# Altium PCB Charger Module.pcbdoc
Units mil, origin at the board's own origin, x right, y up, seen from the top; angles counter-clockwise.
Board outline 5905.51 x 4527.56 mil, 2 copper layers (Top Layer, Bottom Layer); 43 components, 26 nets, 106 pads, 0 vias.
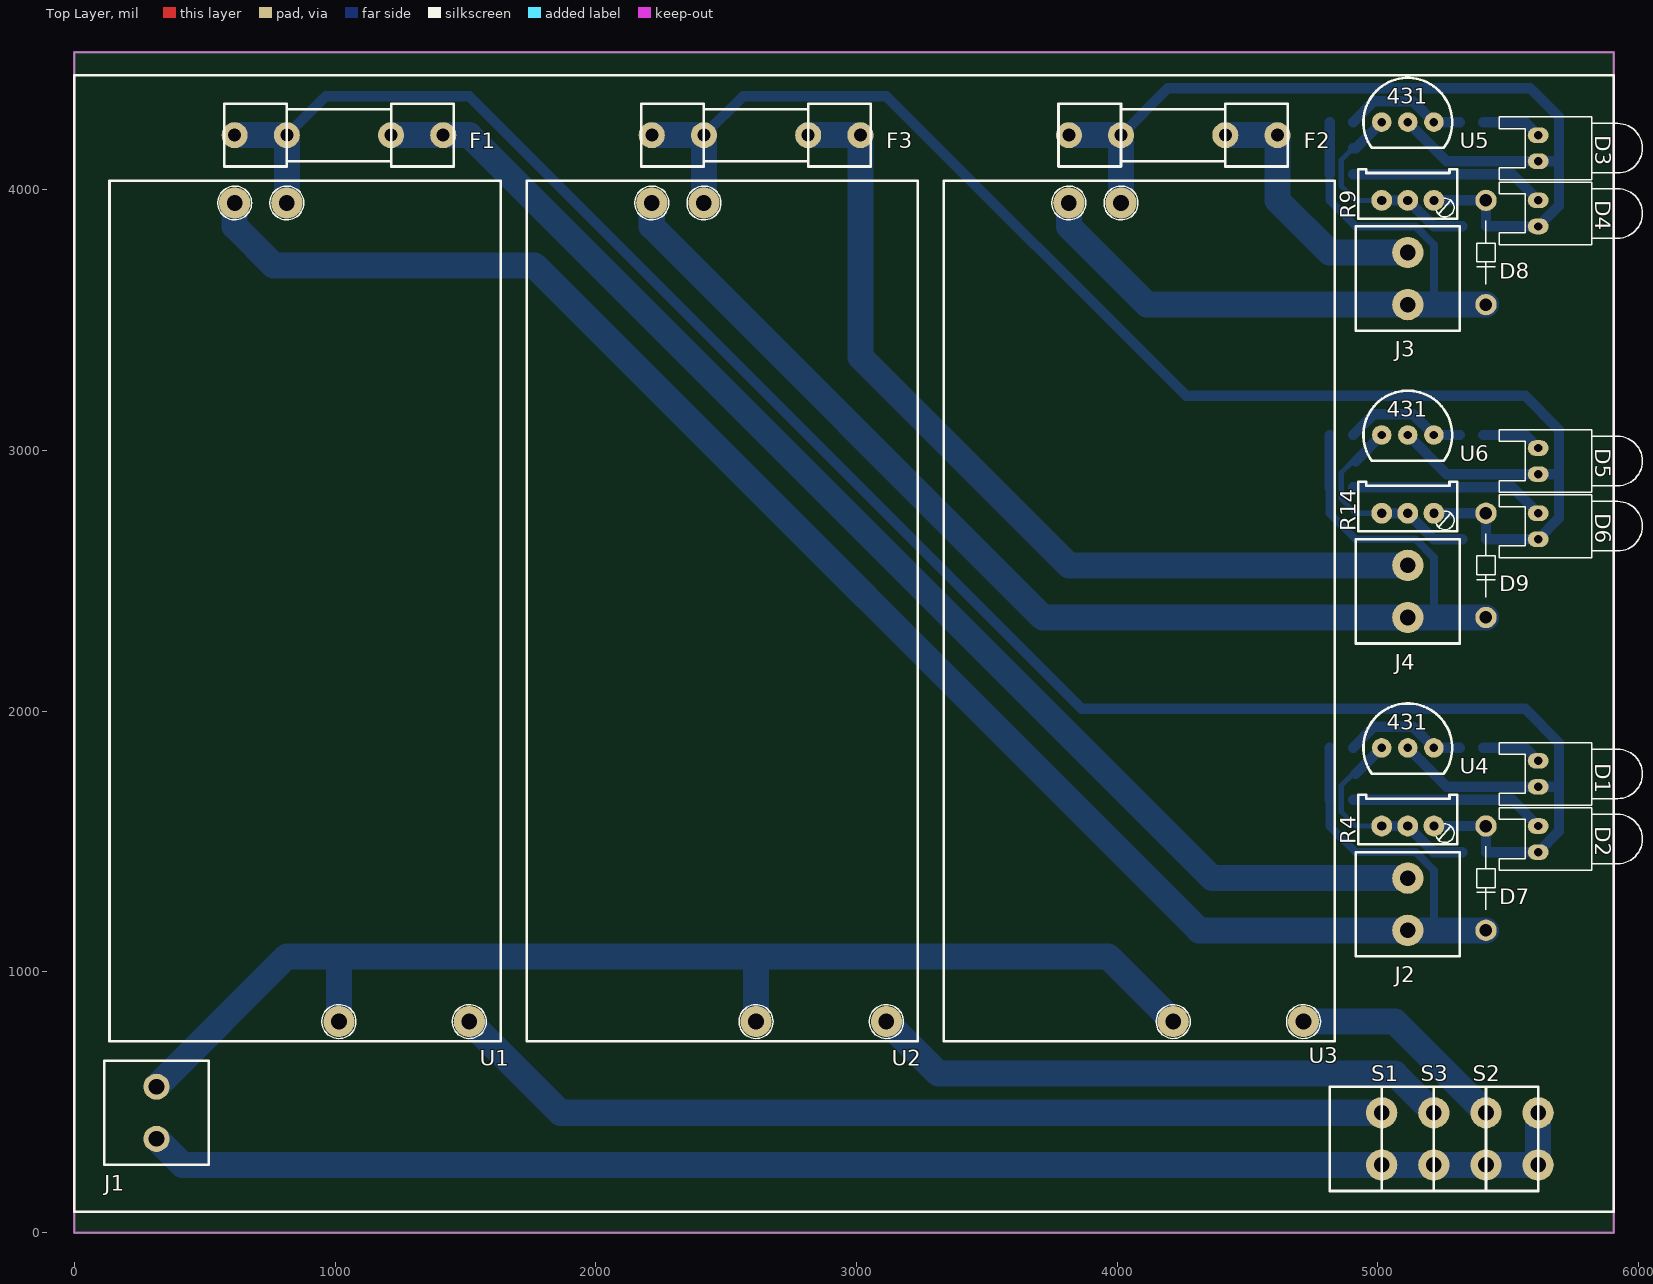
[diagram p0: Top Layer view]
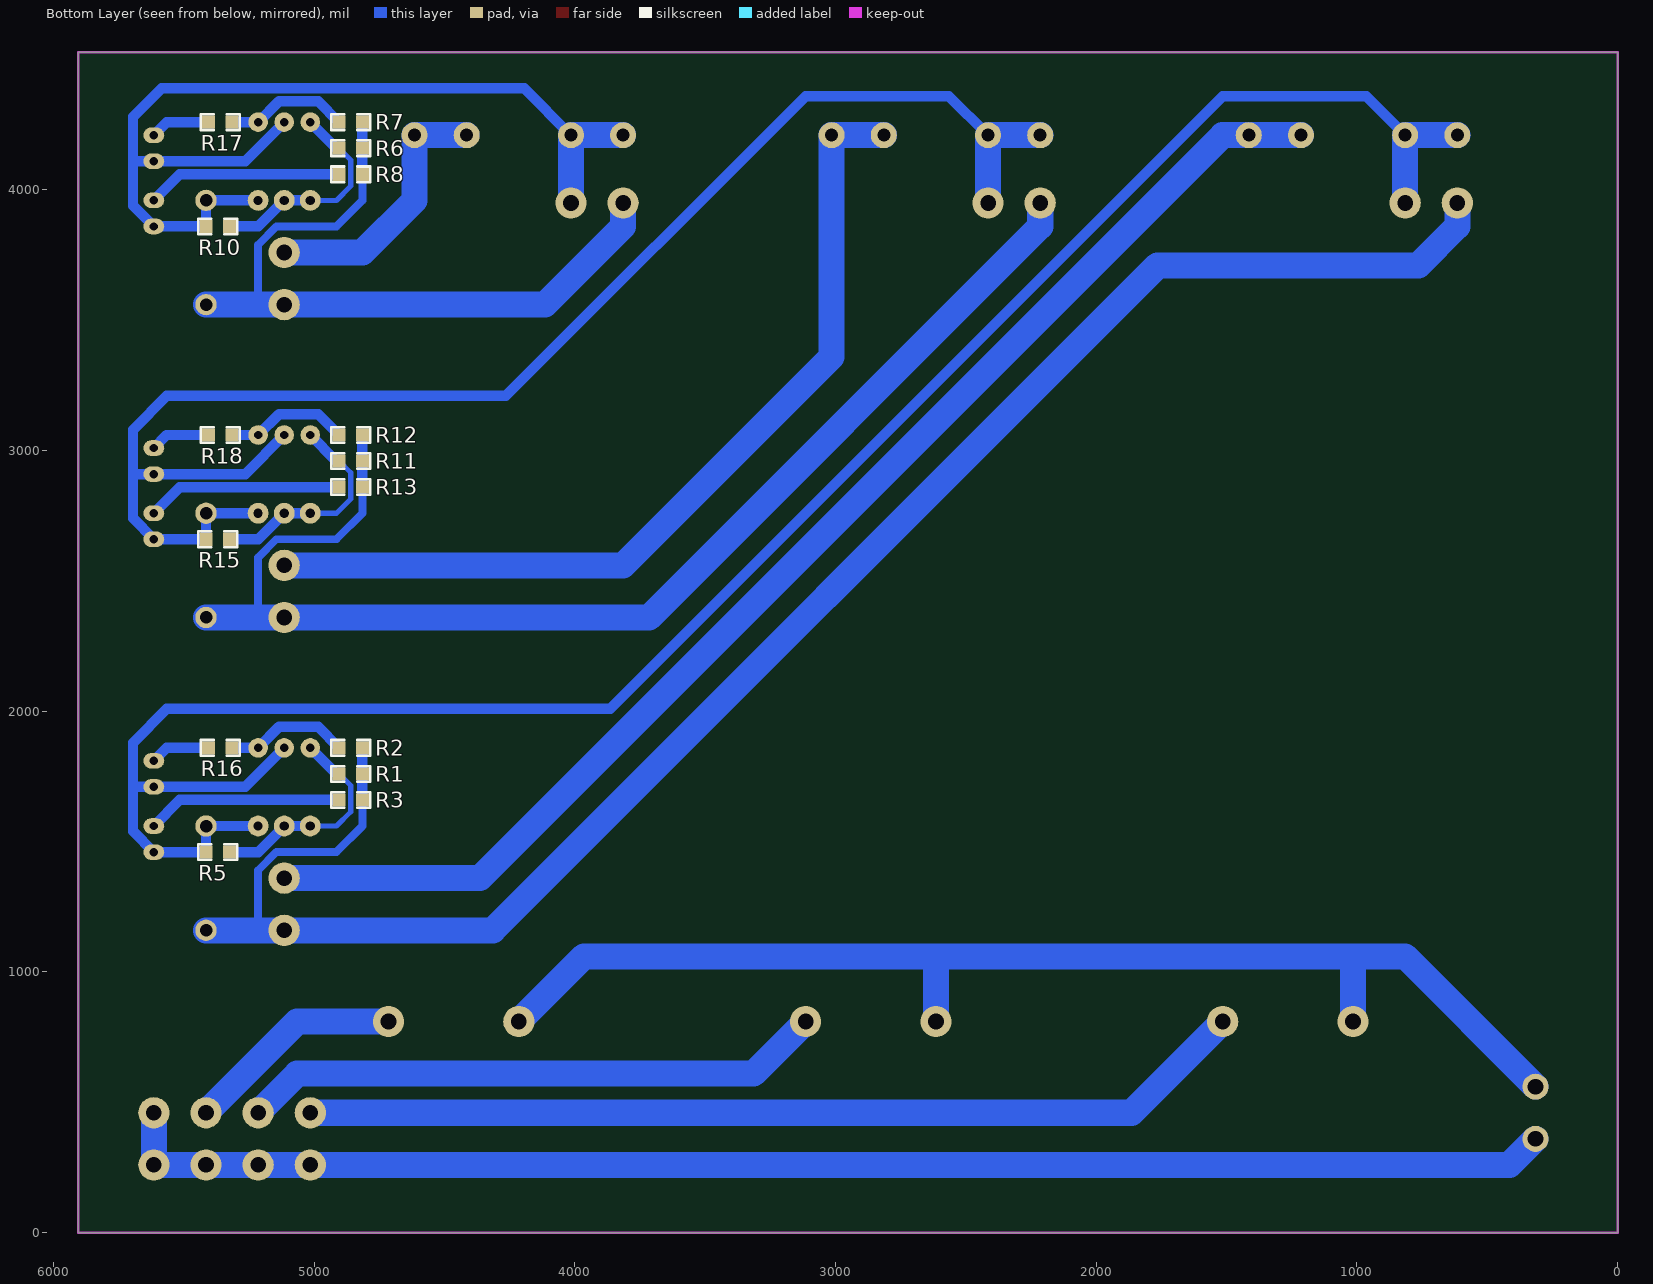
[diagram p1: Bottom Layer view, seen from below]
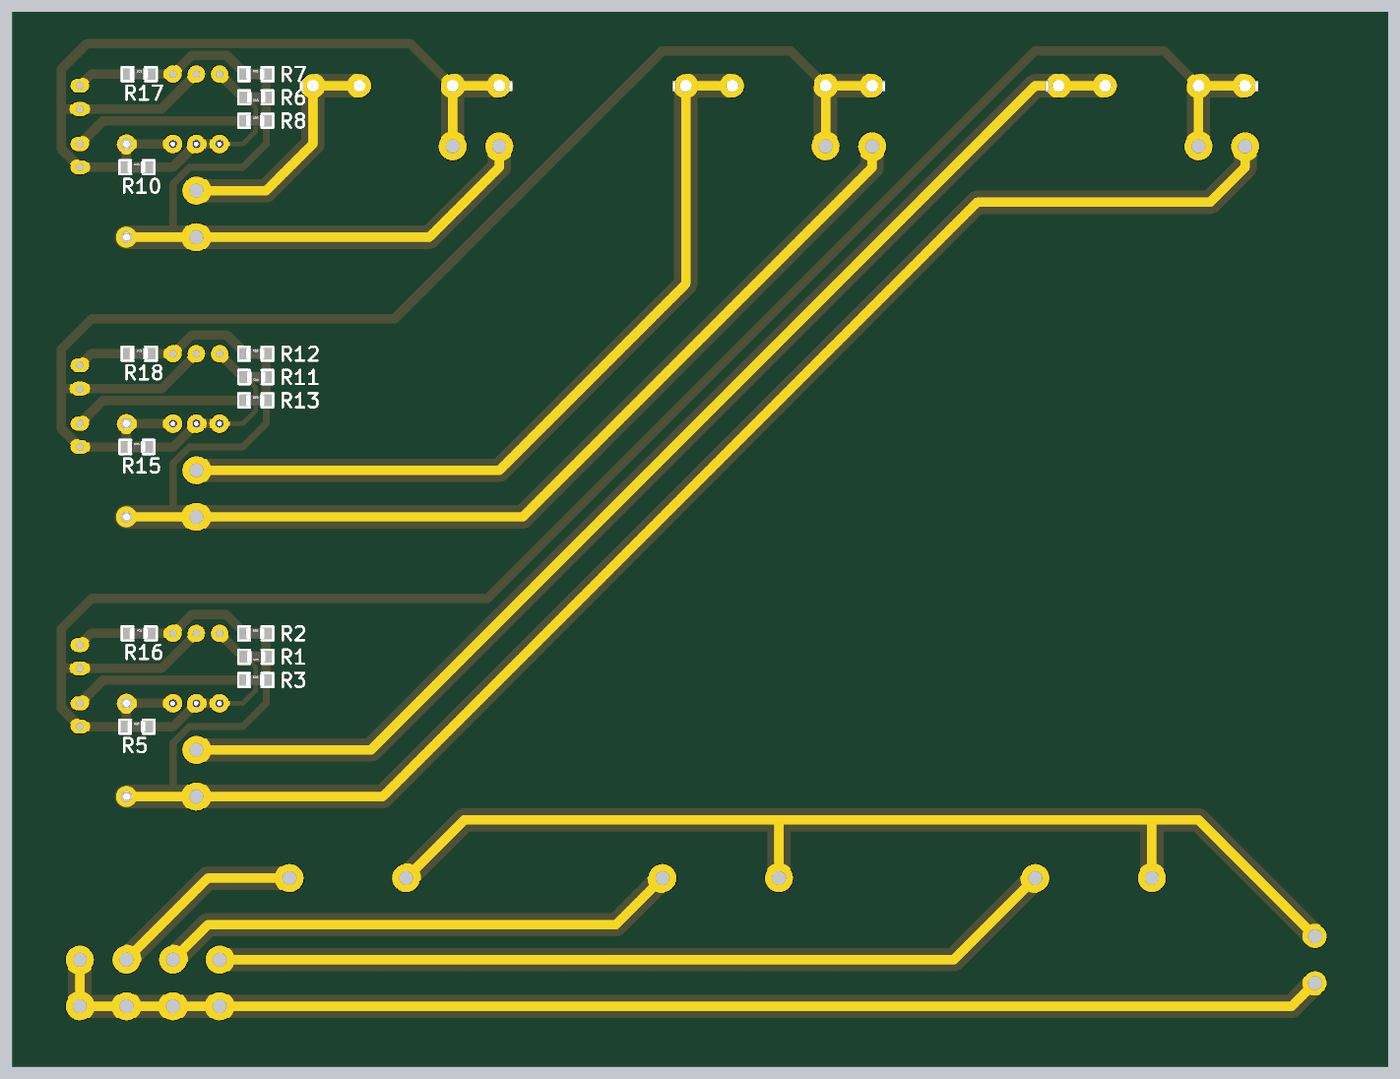
[diagram p2: 3D render of the assembled board from below, using the file's embedded part models]

## Layer stack, top to bottom
Top Solder: solder mask 0.4, Solder Resist, Dk 3.5
Top Layer: signal copper 1.4
Dielectric 1: dielectric 12.6, FR-4, Dk 4.8
Bottom Layer: signal copper 1.4
Bottom Solder: solder mask 0.4, Solder Resist, Dk 3.5

## Board outline
0,0 0,4527.56 5905.51,4527.56 5905.51,0

## Design rules (kind name [scope] priority, off if disabled: settings)
Clearance [All] p1: gap=10 ignorepadtopadclearanceinfootprint=FALSE except(0: Arc-Hole Track-Hole SMDPad-Hole THPad-Hole Via-Hole Fill-Hole Poly-Hole Region-Hole Text-Hole)
ComponentClearance [All] p1 off: gap=10 collisioncheckmode=3 verticalgap=10 showdistances=FALSE
Height [All] p1 off: minheight=0 maxheight=1000 prefheight=500
PolygonConnect [All] p1: connectstyle=Relief reliefconductorwidth=10 reliefentries=4 polygonreliefangle="90 Angle" airgapwidth=10
RoutingVias [All] p1: holewidth=28 width=50 viastyle="Through Hole" minholewidth=28 minwidth=50 maxholewidth=28 maxwidth=50
SolderMaskExpansion [All] p1: expansion=4
Width [All] p1: maxlimit=100 minlimit=10 preferedwidth=60
28 further rules are at their usual default settings.

## Components (designator, comment, footprint, x,y, rotation, side; value= is the part's Value field where it differs from the comment)
D1 "LED chân cắm 5mm RED" LED-0 5614.96,1759.84 r90 top value=RED
D2 "LED chân cắm 5mm GREEN" LED-0 5614.96,1509.84 r90 top value=GREEN
D3 "LED chân cắm 5mm RED" LED-0 5614.96,4159.84 r90 top value=RED
D4 "LED chân cắm 5mm GREEN" LED-0 5614.96,3909.84 r90 top value=GREEN
D5 "LED chân cắm 5mm RED" LED-0 5614.96,2959.84 r90 top value=RED
D6 "LED chân cắm 5mm GREEN" LED-0 5614.96,2709.84 r90 top value=GREEN
D7 "Diode xung chân cắm 2A FR207" DIODE1A 5414.96,1559.84 r270 top value=FR207
D8 "Diode xung chân cắm 2A FR207" DIODE1A 5414.96,3959.84 r270 top value=FR207
D9 "Diode xung chân cắm 2A FR207" DIODE1A 5414.96,2759.84 r270 top value=FR207
F1 "Cầu chì và đế cầu chì F250V2A" FUSE2 614.96,4209.84 r0 top value=F250V2A
F2 "Cầu chì và đế cầu chì F250V2A" FUSE2 3814.96,4209.84 r0 top value=F250V2A
F3 "Cầu chì và đế cầu chì F250V2A" FUSE2 2214.96,4209.84 r0 top value=F250V2A
J1 "Giắc xanh loại đứng, 300V/16A - 5.08mm 2P" JACK2#1 314.96,559.84 r270 top value=2P
J2 "Giắc xanh loại đứng, 300V/16A - 5.08mm 2P" JACK2#2 5114.96,1159.84 r90 top value=2P
J3 "Giắc xanh loại đứng, 300V/16A - 5.08mm 2P" JACK2#2 5114.96,3559.84 r90 top value=2P
J4 "Giắc xanh loại đứng, 300V/16A - 5.08mm 2P" JACK2#2 5114.96,2359.84 r90 top value=2P
R1 "Điện trở dán 0805 4K7" 0805DD 4814.96,1759.84 r0 bottom value=4K7
R2 "Điện trở dán 0805 1K" 0805DD 4904.96,1859.84 r180 bottom value=1K
R3 "Điện trở dán 0805 2K2" 0805DD 4904.96,1659.84 r180 bottom value=2K2
R4 "Biến trở vi chỉnh TRIMMER 3296 10K" BTXANH 5214.96,1559.84 r180 top value=10K
R5 "Điện trở dán 0805 1K" 0805DD 5414.96,1459.84 r180 bottom value=1K
R6 "Điện trở dán 0805 4K7" 0805DD 4814.96,4159.84 r0 bottom value=4K7
R7 "Điện trở dán 0805 1K" 0805DD 4904.96,4259.84 r180 bottom value=1K
R8 "Điện trở dán 0805 2K2" 0805DD 4904.96,4059.84 r180 bottom value=2K2
R9 "Biến trở vi chỉnh TRIMMER 3296 10K" BTXANH 5214.96,3959.84 r180 top value=10K
R10 "Điện trở dán 0805 1K" 0805DD 5414.96,3859.84 r180 bottom value=1K
R11 "Điện trở dán 0805 4K7" 0805DD 4814.96,2959.84 r0 bottom value=4K7
R12 "Điện trở dán 0805 1K" 0805DD 4904.96,3059.84 r180 bottom value=1K
R13 "Điện trở dán 0805 2K2" 0805DD 4904.96,2859.84 r180 bottom value=2K2
R14 "Biến trở vi chỉnh TRIMMER 3296 10K" BTXANH 5214.96,2759.84 r180 top value=10K
R15 "Điện trở dán 0805 1K" 0805DD 5414.96,2659.84 r180 bottom value=1K
R16 "Điện trở dán 0805 1K" 0805DD 5404.96,1859.84 r180 bottom value=1K
R17 "Điện trở dán 0805 1K" 0805DD 5404.96,4259.84 r180 bottom value=1K
R18 "Điện trở dán 0805 1K" 0805DD 5404.96,3059.84 r180 bottom value=1K
S1 "Giắc cắm loại đứng, 300V/16A - 5.08mm 2P" JACK2#2 5014.96,259.84 r90 top
S2 "Giắc cắm loại đứng, 300V/16A - 5.08mm 2P" JACK2#2 5414.96,259.84 r90 top
S3 "Giắc cắm loại đứng, 300V/16A - 5.08mm 2P" JACK2#2 5214.96,259.84 r90 top
U1 "Module nguồn AC-DC 14.2V" PS15V2A 1514.96,809.84 r90 top
U2 "Module nguồn AC-DC 14.2V" PS15V2A 4714.96,809.84 r90 top
U3 "Module nguồn AC-DC 14.2V" PS15V2A 3114.96,809.84 r90 top
U4 "IC điện áp chuẩn, chân cắm TO92 TL431" TO92_431 5014.96,1859.84 r0 top value=TL431
U5 "IC điện áp chuẩn, chân cắm TO92 TL431" TO92_431 5014.96,4259.84 r0 top value=TL431
U6 "IC điện áp chuẩn, chân cắm TO92 TL431" TO92_431 5014.96,3059.84 r0 top value=TL431

## Footprints (in the part's own frame and the unit in brackets; to place one, negate y for a bottom-side part, rotate by r counter-clockwise, add the part's x,y. Pads: shape width x height; smd on the part's side, far side on the other; paste and mask are expansions set on the pad)
0805DD [mil]
  rect 50x50 smd: 1(0,0) 2(90,0)
  silkscreen extent -30,-30 120,30, body extent 4,-25 82,25, height 31
BTXANH [mil]
  round 80 hole 35: 1(0,0) 2(100,0) 3(200,0)
  silkscreen extent -90,-120 290,70, body extent -82,-94 280,95, height 473
DIODE1A [mil]
  round 82 hole 48: 1(0,0) 2(400,0)
  silkscreen extent 78,-35 322,35, body extent -15,-51 415,50, height 120
FUSE2 [mil]
  round 100 hole 50: 1(0,0) 1(200,0) 2(600,0) 2(800,0)
  silkscreen extent -40,-120 840,120, body extent -56,-179 856,175, height 521
JACK2#1 [mil]
  round 100 hole 60: 1(0,0) 2(200,0)
  silkscreen extent -100,-200 300,200
JACK2#2 [mil]
  round 120 hole 60: 1(0,0) 2(200,0)
  silkscreen extent -100,-200 300,200
LED-0 [mil] "LED; 2 Leads"
  oval 60x80 hole 32: 1(50,0) 2(-50,0)
  silkscreen extent -120,-400 120,150
PS15V2A [mil]
  round 120 hole 60: 1(0,0) 2(0,500) 3(3140,700) 4(3140,900)
  silkscreen extent -75,-120 3225,1380
TO92_431 [mil]
  round 75 hole 32: 1(0,0) 2(100,0) 3(200,0)
  silkscreen extent -70,-99 270,170

## Part data
D1 D2 D3 D4 D5 D6: library part LED0, "Typical INFRARED GaAs LED", Type1="LED dán 0805", Type2="LED chân c?m 3mm", Type3="LED chân c?m 5mm"
D7 D8 D9: library part DIODE, Type1="Diode xung chân c?m 3A", Type2="Diode ch?nh luu chân c?m 1A", Type3="Diode ch?nh luu chân c?m 3A", Type4="Diode xung chân c?m 2A"
F1 F2 F3: library part "Fuse 1", "Fuse", LatestRevisionDate=17-Jul-2002, LatestRevisionNote="Re-released for DXP Platform.", PackageDescription="Thru-Hole; 2 Leads", PackageReference=PIN-W2/E2.8, Published=8-Jun-2000, Publisher="Altium Limited", Type1="C?u chì và d? c?u chì"
J1 J2 J3 J4: library part CON2, Type1="Gi?c xanh lo?i n?m, 300V/16A - 5.08mm", Type2="Jump d?c lo?i th?ng, 2.54mm", Type3=Jumper, Type4="Gi?c xanh lo?i n?m, 300V/16A - 3.81mm"
R1 R2 R3 R5 R6 R7 R8 R10 R11 R12 R13 R15 R16 R17 R18: library part "Res Semi", "Semiconductor Resistor", Type1="Ði?n tr? dán 0805", Type2="Ði?n tr? chân c?m 1/4W", Type3="Ði?n tr? chân c?m 2W"
R4 R9 R14: library part RPot, "Potentiometer", Type1="Bi?n tr? vi ch?nh TRIMMER 3296"
S1 S2 S3: library part SW-SPST, "Single-Pole, Single-Throw Switch", LatestRevisionDate=17-Jul-2002, LatestRevisionNote="Re-released for DXP Platform.", PackageDescription="Switch; 2 Leads", PackageReference=SPST-2, Published=24-Mar-1999, Publisher="Altium Limited"
U1 U2 U3: library part SACACQUY
U4 U5 U6: library part TL431, "Adjustable Precision Shunt Regulator", Type1="IC di?n áp chu?n, chân c?m TO92"

## Free pads (board coordinates)
  round 120 hole 60: 2(5614.96,459.84) 3(5614.96,259.84)

## Nets (pads, with @x,y where several pads share a name; then routed paths per layer and width w, separated by ;. In a path a pad name is that pad's centre, name@x,y a point inside that pad or via, vN(x,y) a via of type N, cw(c..) or ccw(c..) an arc to the next point about the centre after c; other vN are vias at no path point)
GND1: D1.2 D2.2 D7.1 F1.1 R4.1 R5.1 U1.3 U4.2 | length 8024.7
  Bottom Layer w40: F1.1@814.96,4209.84 964.96,4359.84 1514.96,4359.84 3864.96,2009.84 5564.96,2009.84 5694.96,1879.84 5694.96,1709.84 ; U4.2 5264.96,1709.84 D1.2 5694.96,1709.84 ; R4.1 D7.1 R5.1 D2.2 5694.96,1539.84 5694.96,1709.84
  Bottom Layer w100: F1.1@614.96,4209.84 814.96,4209.84 U1.3
GND2: D3.2 D4.2 D8.1 F2.1 R9.1 R10.1 U2.3 U5.2 | length 3855.4
  Bottom Layer w40: F2.1@4014.96,4209.84 4194.96,4389.84 5584.96,4389.84 5694.96,4279.84 5694.96,4109.84 ; U5.2 5264.96,4109.84 D3.2 5694.96,4109.84 ; R9.1 D8.1 R10.1 D4.2 5694.96,3939.84 5694.96,4109.84
  Bottom Layer w100: F2.1@3814.96,4209.84 4014.96,4209.84 U2.3
GND3: D5.2 D6.2 D9.1 F3.1 R14.1 R15.1 U3.3 U6.2 | length 5927.6
  Bottom Layer w40: F3.1@2414.96,4209.84 2564.96,4359.84 3114.96,4359.84 4264.96,3209.84 5564.96,3209.84 5694.96,3079.84 5694.96,2909.84 ; U6.2 5264.96,2909.84 D5.2 5694.96,2909.84 ; R14.1 D9.1 R15.1 D6.2 5694.96,2739.84 5694.96,2909.84
  Bottom Layer w100: F3.1@2214.96,4209.84 2414.96,4209.84 U3.3
NetD1_1: D1.1 R16.1 | length 230.7
  Bottom Layer w40: R16.1 5564.96,1859.84 D1.1
NetD2_1: D2.1 R3.1 | length 751.4
  Bottom Layer w40: R3.1 5514.96,1659.84 D2.1
NetD3_1: D3.1 R17.1 | length 230.7
  Bottom Layer w40: R17.1 5564.96,4259.84 D3.1
NetD4_1: D4.1 R8.1 | length 751.4
  Bottom Layer w40: R8.1 5514.96,4059.84 D4.1
NetD5_1: D5.1 R18.1 | length 230.7
  Bottom Layer w40: R18.1 5564.96,3059.84 D5.1
NetD6_1: D6.1 R13.1 | length 751.4
  Bottom Layer w40: R13.1 5514.96,2859.84 D6.1
NetF1_2: F1.2 J2.2 | length 5080.5
  Bottom Layer w100: F1.2@1214.96,4209.84 1414.96,4209.84 1514.96,4209.84 4364.96,1359.84 J2.2
NetF2_2: F2.2 J3.2 | length 1032.8
  Bottom Layer w100: F2.2@4414.96,4209.84 4614.96,4209.84 4614.96,3959.84 4814.96,3759.84 J3.2
NetF3_2: F3.2 J4.2 | length 3481.4
  Bottom Layer w100: F3.2@2814.96,4209.84 3014.96,4209.84 3014.96,3359.84 3814.96,2559.84 J4.2
NetJ1_1: J1.1 U1.2 U2.2 U3.2 | length 4710.7
  Bottom Layer w100: J1.1 814.96,1059.84 1014.96,1059.84 ; U1.2 1014.96,1059.84 ; U3.2 2614.96,1059.84 ; U2.2 3964.96,1059.84 1014.96,1059.84
NetJ1_2: J1.2 pad.2 pad.3 S1.1 S2.1 S3.1 | length 5541.4
  Bottom Layer w100: J1.2 414.96,259.84 S1.1 S3.1 S2.1 pad.3 pad.2
NetR1_2: R1.2 R4.2 R4.3 R5.2 U4.1 | length 934.3
  Bottom Layer w20: R1.2 4859.96,1714.84 4859.96,1614.84 4914.96,1559.84 R4.3
  Bottom Layer w40: R1.2@4914.96,1759.84 U4.1 ; R5.2 5214.96,1459.84 R4.2 ; R4.2 R4.3 R4.2
NetR2_1: R2.1 R16.2 U4.3 | length 476.3
  Bottom Layer w40: R2.1 4984.96,1939.84 5134.96,1939.84 U4.3 R16.2
NetR6_2: R6.2 R9.2 R9.3 R10.2 U5.1 | length 844.3
  Bottom Layer w20: R6.2 4859.96,4114.84 4859.96,4014.84 4914.96,3959.84 R9.3
  Bottom Layer w40: R6.2 4914.96,4159.84 U5.1 ; R9.3 R9.2 5214.96,3859.84 R10.2
NetR7_1: R7.1 R17.2 U5.3 | length 476.3
  Bottom Layer w40: R7.1 4984.96,4339.84 5134.96,4339.84 U5.3 R17.2
NetR11_2: R11.2 R14.2 R14.3 R15.2 U6.1 | length 934.3
  Bottom Layer w20: R11.2 4859.96,2914.84 4859.96,2814.84 4914.96,2759.84 R14.3
  Bottom Layer w40: R11.2@4914.96,2959.84 U6.1 ; R15.2 5214.96,2659.84 R14.2 ; R14.2 R14.3 R14.2
NetR12_1: R12.1 R18.2 U6.3 | length 476.3
  Bottom Layer w40: R12.1 4984.96,3139.84 5134.96,3139.84 U6.3 R18.2
NetS1_2: S1.2 U1.1 | length 3645
  Bottom Layer w100: U1.1 1864.96,459.84 S1.2
NetS2_2: S2.2 U2.1 | length 845
  Bottom Layer w100: U2.1 5064.96,809.84 S2.2
NetS3_2: S3.2 U3.1 | length 2245
  Bottom Layer w100: U3.1 3314.96,609.84 5064.96,609.84 S3.2
VCC1: D7.2 J2.1 R1.1 R2.2 R3.2 U1.4 | length 7008.8
  Bottom Layer w30: R3.2 4814.96,1559.84 4914.96,1459.84 5144.96,1459.84 5214.96,1389.84 5214.96,1159.84
  Bottom Layer w40: R3.2 R1.1 R2.2
  Bottom Layer w100: U1.4 614.96,3859.84 764.96,3709.84 1764.96,3709.84 4314.96,1159.84 J2.1 5214.96,1159.84 D7.2
VCC2: D8.2 J3.1 R6.1 R7.2 R8.2 U2.4 | length 2814.7
  Bottom Layer w30: R8.2 4814.96,3959.84 4914.96,3859.84 5144.96,3859.84 5214.96,3789.84 5214.96,3559.84
  Bottom Layer w40: R8.2 R6.1 R7.2
  Bottom Layer w100: U2.4 3814.96,3859.84 4114.96,3559.84 J3.1 5214.96,3559.84 D8.2
VCC3: D9.2 J4.1 R11.1 R12.2 R13.2 U3.4 | length 4911.7
  Bottom Layer w30: R13.2 4814.96,2759.84 4914.96,2659.84 5144.96,2659.84 5214.96,2589.84 5214.96,2359.84
  Bottom Layer w40: R13.2 R11.1 R12.2
  Bottom Layer w100: U3.4 2214.96,3859.84 3714.96,2359.84 J4.1 5214.96,2359.84 D9.2

## Keep-outs
Keep-Out Layer:
  lines w10: 0,0 0,4527.56 5905.51,4527.56 5905.51,0 5393.7,0 0,0

## Silkscreen, mask and mechanical layers (free items; w line width, h text height)
Top Overlay:
  lines w10: 0,79.84 5904.96,79.84 5904.96,4439.84 0,4439.84 0,79.84
Bottom Solder:
  lines w40: 314.96,359.84 414.96,259.84 5614.96,259.84 5614.96,459.84 ; 314.96,559.84 814.96,1059.84 3964.96,1059.84 4214.96,809.84 ; 614.96,3949.84 614.96,3859.84 764.96,3709.84 1764.96,3709.84 4314.96,1159.84 5414.96,1159.84 ; 614.96,4209.84 814.96,4209.84 814.96,3949.84 ; 1014.96,809.84 1014.96,1059.84 ; 1214.96,4209.84 1414.96,4209.84 1514.96,4209.84 4364.96,1359.84 5114.96,1359.84 ; 1514.96,809.84 1864.96,459.84 5014.96,459.84 ; 2214.96,3949.84 2214.96,3859.84 3714.96,2359.84 5414.96,2359.84 ; 2214.96,4209.84 2414.96,4209.84 2414.96,3949.84 ; 2614.96,809.84 2614.96,1059.84 ; 2814.96,4209.84 3014.96,4209.84 3014.96,3359.84 3814.96,2559.84 5114.96,2559.84 ; 3114.96,809.84 3314.96,609.84 5064.96,609.84 5214.96,459.84 ; 3814.96,3949.84 3814.96,3859.84 4114.96,3559.84 5414.96,3559.84 ; 3814.96,4209.84 4014.96,4209.84 4014.96,3949.84 ; 4414.96,4209.84 4614.96,4209.84 4614.96,3959.84 4814.96,3759.84 5114.96,3759.84 ; 4714.96,809.84 5064.96,809.84 5414.96,459.84

## Text inside footprints (layer, text, board x,y; h text height)
U4: Top Overlay "431" at 5034.96,1929.84 h60
U5: Top Overlay "431" at 5034.96,4329.84 h60
U6: Top Overlay "431" at 5034.96,3129.84 h60